# EAGLE board flux (EAGLE 6.4)
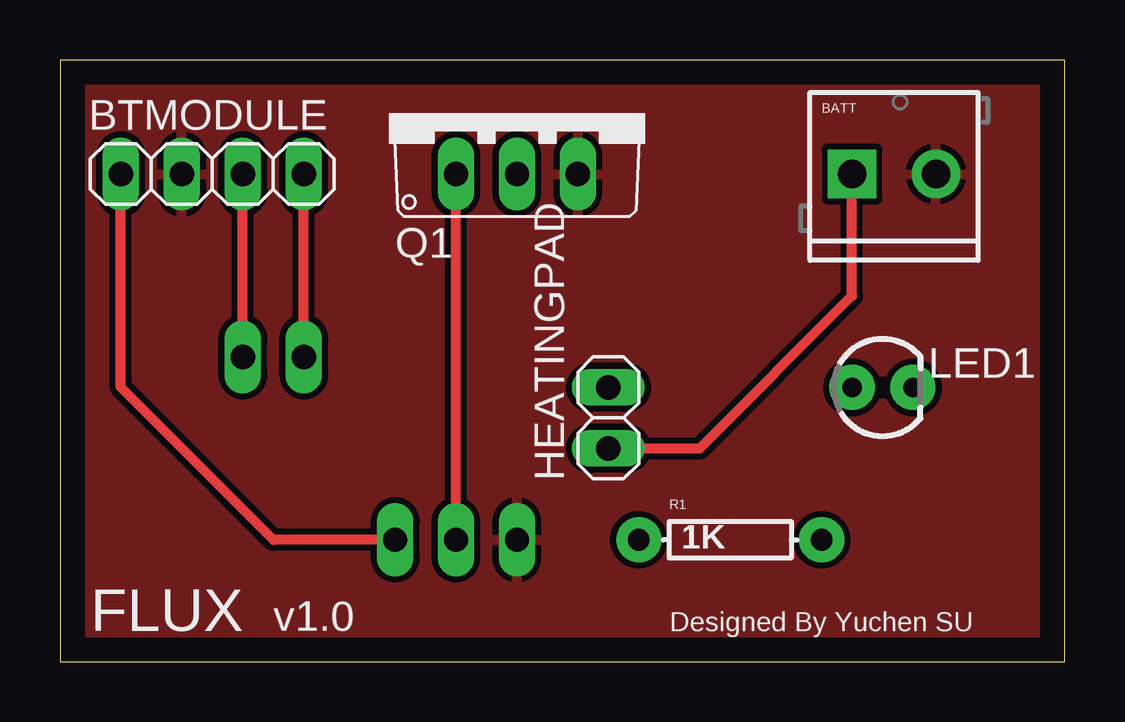
[diagram p0: board, top side]
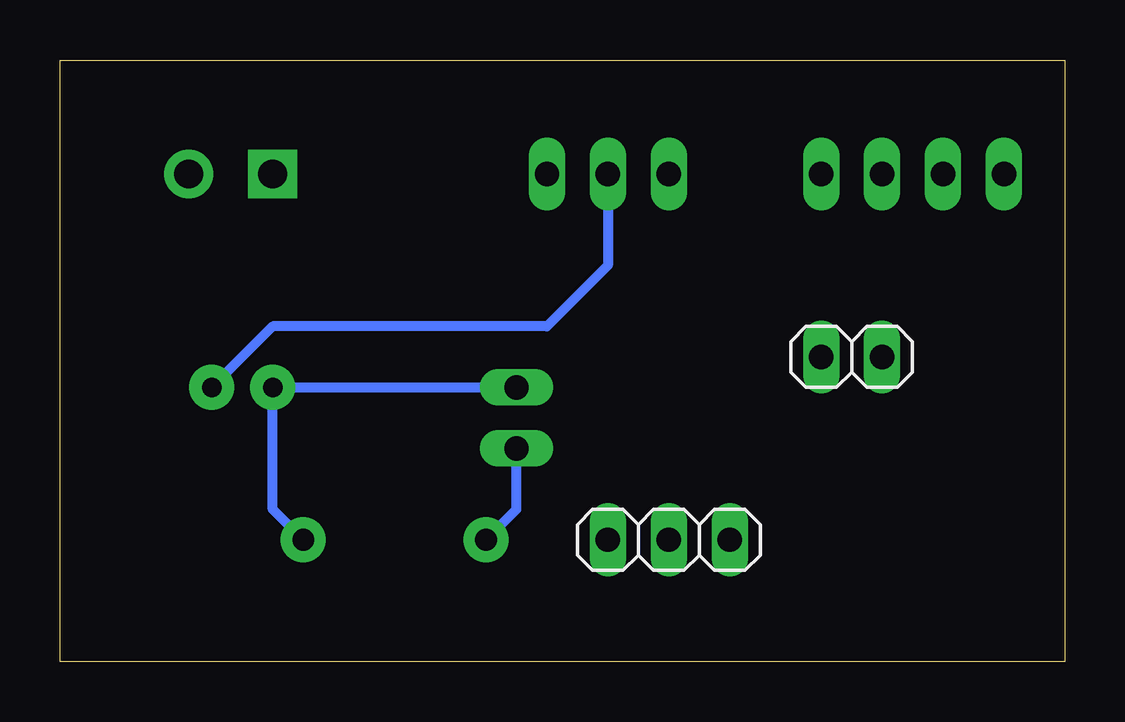
[diagram p1: board, bottom side, seen from below]

Size 41.89 x 25.07 mm. Coordinates in mm from the lower left corner, seen from the top.
Outline: 0,0 41.89,0 41.89,25.07 0,25.07 0,0
Copper layers (1*16): Top 0.035mm / dielectric 1.5mm / Bottom 0.035mm
Design rules "default": minimum track width 10mil, minimum drill 24mil, track to track 8mil, track to pad 8mil, pad to pad 8mil, via to via 8mil, smd to smd 8mil, copper to edge 40mil, drill to drill 8mil, minimum pad ring 10mil, minimum via ring 8mil, stop-mask expansion 4mil, vias tented up to drill 0mil, thermal gap 10mil
Net classes: 0 default: width 0.305 mm, drill 0.508 mm, clearance 0.254 mm

## Footprints (pad centres in the part's own frame; a part is rotated, then mirrored left to right if it is on the bottom)
SCREWTERMINAL-3.5MM-2 = drill 1.2 pad 2.032 square: 1 0,0 | drill 1.2 pad 2.032: 2 3.5,0
1X04 = drill 1.016 long: 1 -3.81,0; 2 -1.27,0; 3 1.27,0; 4 3.81,0
1X02 = drill 1.016 long: 1 -1.27,0; 2 1.27,0
1X03 = drill 1.016 long: 1 -2.54,0; 2 0,0; 3 2.54,0
LED3MM = drill 0.813 pad 1.88: A -1.27,0; K 1.27,0
TO220V = drill 1.016 long: 1 -2.54,-2.54; 2 0,-2.54; 3 2.54,-2.54
AXIAL-0.3 = drill 0.9 pad 1.88: P$1 -3.81,0; P$2 3.81,0

## Placement (x,y rotation side)
BATT  M023.5MM  [SCREWTERMINAL-3.5MM-2]  33.02,20.32 0 top
BTMODULE  [1X04]  6.35,20.32 0 top
HEATINGPAD  [1X02]  22.86,10.16 90 top
JP1  [1X03]  16.51,5.08 0 bottom
LED1  [LED3MM]  34.29,11.43 0 top
Q1  [TO220V]  19.05,22.86 0 top
R1  1K  [AXIAL-0.3]  27.94,5.08 0 top
TX/RX  [1X02]  8.89,12.7 0 bottom

## Library data of the parts
BATT = SparkFun-Connectors
BTMODULE HEATINGPAD JP1 TX/RX = pinhead
LED1 = SparkFun-LED
Q1 = adafruit
R1 = SparkFun-Resistors; PROD_ID: RES-12182

## Nets
GND: BATT.2 BTMODULE.2 JP1.1 Q1.3
N$1: HEATINGPAD.2 LED1.A R1.P$2
N$2: LED1.K Q1.2
N$3: BTMODULE.1 JP1.3
N$4: JP1.2 Q1.1
N$5: BTMODULE.3 TX/RX.2
N$6: BTMODULE.4 TX/RX.1
VCC: BATT.1 HEATINGPAD.1 R1.P$1

## Tracks (layer width: path | path; a pad name or v marks a point on that pad's centre or on a via)
GND
  pour Top: 0,25.4 -1.27,25.4 -1.27,24.13 -1.27,-1.27 43.18,-1.27 43.18,0 43.18,25.4
N$1
  Bottom 0.406: R1.P$2 33.02,6.35 LED1.A HEATINGPAD.2
N$2
  Bottom 0.406: Q1.2 19.05,16.51 21.59,13.97 33.02,13.97 LED1.K
N$3
  Top 0.406: JP1.3 8.89,5.08 2.54,11.43 BTMODULE.1
N$4
  Top 0.406: JP1.2 Q1.1
N$5
  Top 0.406: TX/RX.2 BTMODULE.3
N$6
  Top 0.406: TX/RX.1 BTMODULE.4
VCC
  Top 0.406: HEATINGPAD.1 26.67,8.89 33.02,15.24 BATT.1
  Bottom 0.406: R1.P$1 22.86,6.35 HEATINGPAD.1

## Text on the board
tPlace: FLUX | v1.0 | Designed By Yuchen SU